# EAGLE board AD5933 (EAGLE 7.7.0)
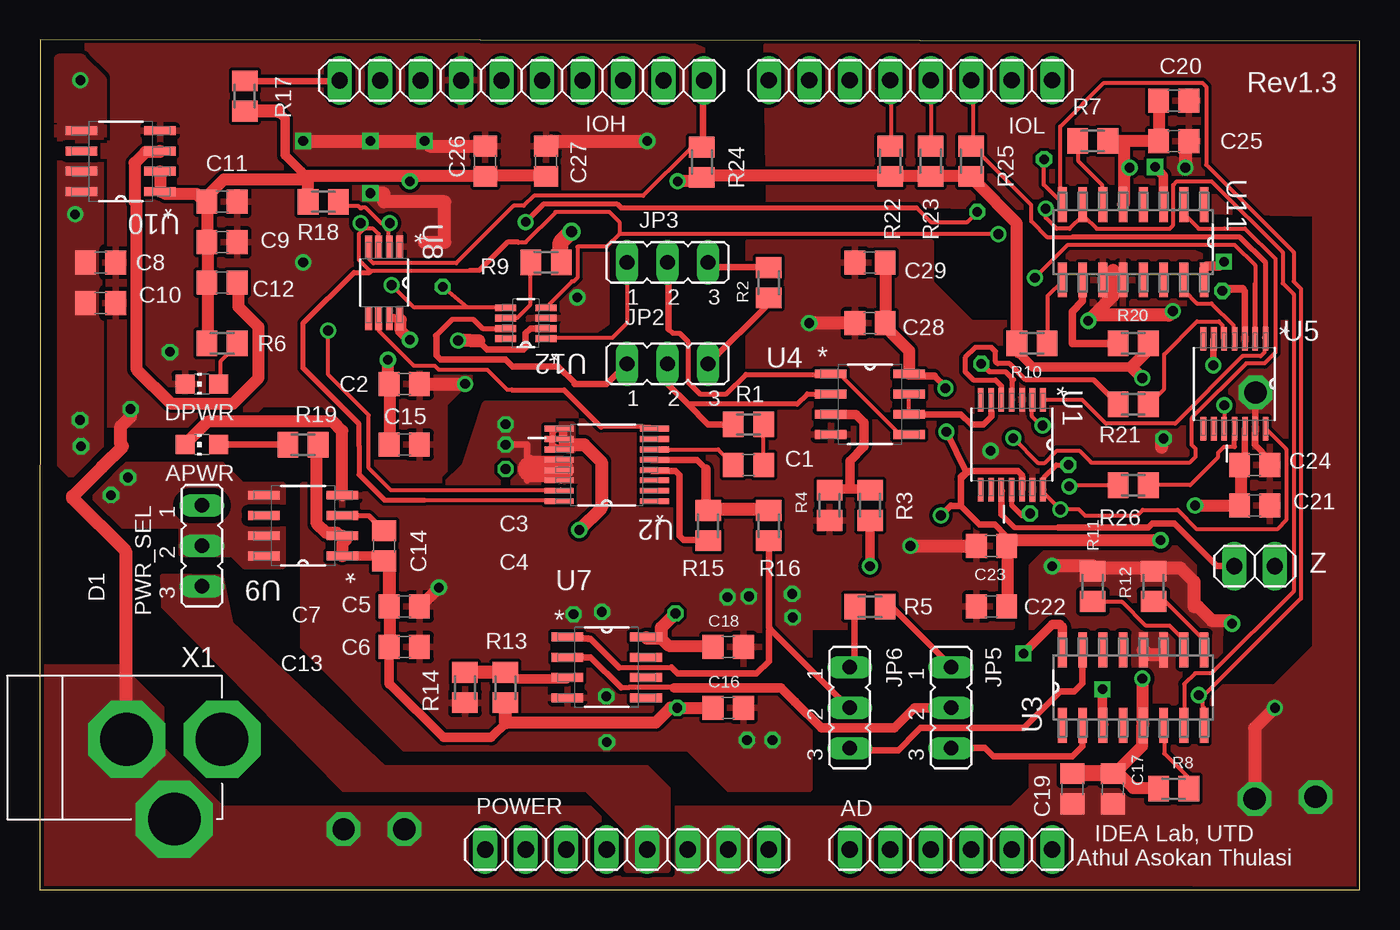
[diagram p0: board, top side]
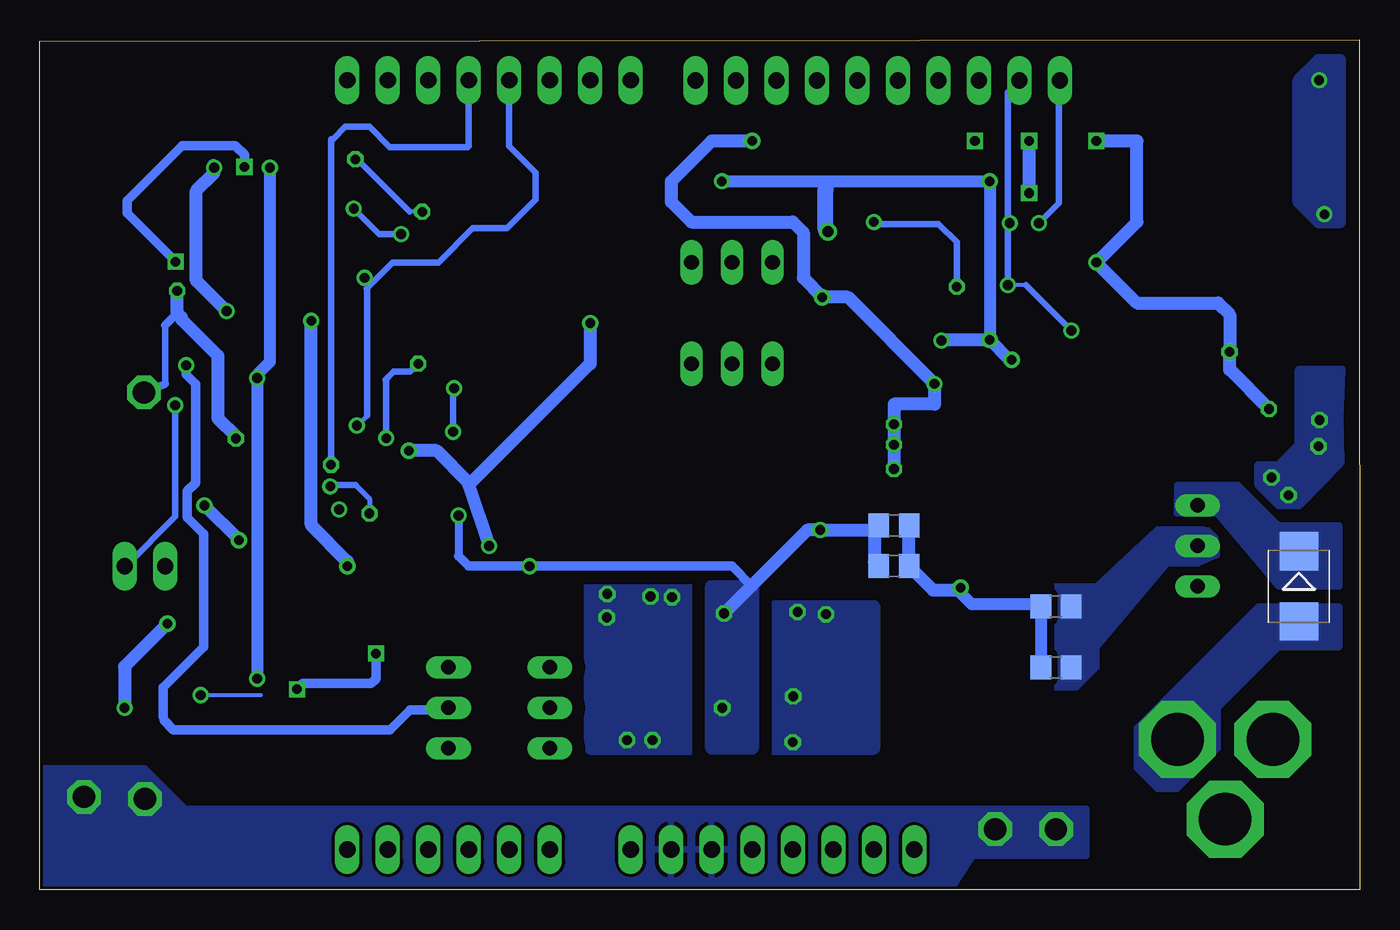
[diagram p1: board, bottom side, seen from below]

Size 82.78 x 53.34 mm. Coordinates in mm from the lower left corner, seen from the top.
Outline: 0,0 82.78,0 82.78,53.26 0.03,53.34 0,0
Copper layers (1*16): Top 0.035mm / dielectric 1.6mm / Bottom 0.035mm
Design rules "default *": minimum track width 10mil, minimum drill 12mil, track to track 8mil, track to pad 8mil, pad to pad 8mil, via to via 8mil, smd to smd 8mil, copper to edge 8mil, drill to drill 12mil, minimum pad ring 10mil, minimum via ring 8mil, stop-mask expansion 6mil, vias tented up to drill 0mil, thermal gap 10mil
Net classes: 0 default: drill 0.305 mm; 1 power 5v: width 0.406 mm, drill 0.61 mm

## Footprints (pad centres in the part's own frame; a part is rotated, then mirrored left to right if it is on the bottom)
1X06 = drill 1.016 long: 1 -6.35,0; 2 -3.81,0; 3 -1.27,0; 4 1.27,0; 5 3.81,0; 6 6.35,0
CHIP-LED0805 = smd 1.2 x 1.2: A 0,-1.05; C 0,1.05
C0805 = smd 1.3 x 1.5: 1 -0.95,0; 2 0.95,0
SMB = smd 2.4 x 2.4: A 2.2,0; C -2.2,0
1X10 = drill 1.016 long: 1 -11.43,0; 2 -8.89,0; 3 -6.35,0; 4 -3.81,0; 5 -1.27,0; 6 1.27,0; 7 3.81,0; 8 6.35,0; 9 8.89,0; 10 11.43,0
1X08 = drill 1.016 long: 1 -8.89,0; 2 -6.35,0; 3 -3.81,0; 4 -1.27,0; 5 1.27,0; 6 3.81,0; 7 6.35,0; 8 8.89,0
JP2 = drill 0.914 long: 1 -2.54,0; 2 0,0; 3 2.54,0
M0805 = smd 1.3 x 1.6: 1 -0.95,0; 2 0.95,0
SOP65P640X120-14N = smd 1.473 x 0.356: 1 -2.819,1.956; 2 -2.819,1.295; 3 -2.819,0.66; 4 -2.819,0; 5 -2.819,-0.66; 6 -2.819,-1.295; 7 -2.819,-1.956; 8 2.819,-1.956; 9 2.819,-1.295; 10 2.819,-0.66; 11 2.819,0; 12 2.819,0.66; 13 2.819,1.295; 14 2.819,1.956
SOP65P640X120-16N = smd 1.473 x 0.356: 1 -2.819,2.286; 2 -2.819,1.626; 3 -2.819,0.965; 4 -2.819,0.33; 5 -2.819,-0.33; 6 -2.819,-0.965; 7 -2.819,-1.626; 8 -2.819,-2.286; 9 2.819,-2.286; 10 2.819,-1.626; 11 2.819,-0.965; 12 2.819,-0.33; 13 2.819,0.33; 14 2.819,0.965; 15 2.819,1.626; 16 2.819,2.286 | smd 0.711 x 0.356: P$1 3.556,2.286; P$2 3.556,1.626; P$3 3.556,0.965; P$4 3.556,0.33; P$5 3.556,-0.33; P$6 3.556,-0.965; P$7 3.556,-1.626; P$8 3.556,-2.286; P$9 -3.556,-2.286; P$10 -3.556,-1.626; P$11 -3.556,-0.965; P$12 -3.556,-0.33; P$13 -3.556,0.33; P$14 -3.556,0.965; P$15 -3.556,1.626; P$16 -3.556,2.286
SOIC127P600X175-16N = smd 2.184 x 0.559: 1 -2.362,4.445; 2 -2.362,3.175; 3 -2.362,1.905; 4 -2.362,0.635; 5 -2.362,-0.635; 6 -2.362,-1.905; 7 -2.362,-3.175; 8 -2.362,-4.445; 9 2.362,-4.445; 10 2.362,-3.175; 11 2.362,-1.905; 12 2.362,-0.635; 13 2.362,0.635; 14 2.362,1.905; 15 2.362,3.175; 16 2.362,4.445
SOIC127P600X175-8N = smd 1.981 x 0.559: 1 -2.464,1.905; 2 -2.464,0.635; 3 -2.464,-0.635; 4 -2.464,-1.905; 5 2.464,-1.905; 6 2.464,-0.635; 7 2.464,0.635; 8 2.464,1.905
SOP65P490X110-8N = smd 1.397 x 0.432: 1 -2.261,0.965; 2 -2.261,0.33; 3 -2.261,-0.33; 4 -2.261,-0.965; 5 2.261,-0.965; 6 2.261,-0.33; 7 2.261,0.33; 8 2.261,0.965
SOT65P280X145-8N = smd 1.321 x 0.432: 1 -1.27,0.965; 2 -1.27,0.33; 3 -1.27,-0.33; 4 -1.27,-0.965; 5 1.27,-0.965; 6 1.27,-0.33; 7 1.27,0.33; 8 1.27,0.965
DC-21MM = drill 3.302 pad 4.826 octagon: 1 -5.08,-3.353; 2 -0.076,-6.35; 3 -0.076,-0.356
1X02 = drill 1.016 long: 1 -1.27,0; 2 1.27,0

## Placement (x,y rotation side)
AD  6  [1X06]  57.15,2.54 0 top
APWR  GREEN  [CHIP-LED0805]  10.16,27.94 90 top
C1  1u  [C0805]  44.45,26.67 0 top
C2  0.1u  [C0805]  22.86,31.75 0 top
C3  10u  [C0805]  29.21,22.86 0 bottom
C4  0.1u  [C0805]  29.21,20.32 0 bottom
C5  10u  [C0805]  22.86,17.78 0 top
C6  0.1u  [C0805]  22.86,15.24 0 top
C7  0.1u  [C0805]  19.05,17.78 180 bottom
C8  0.1u  [C0805]  3.81,39.37 0 top
C9  10u  [C0805]  11.43,40.64 0 top
C10  10u  [C0805]  3.81,36.83 0 top
C11  0.1u  [C0805]  11.43,43.18 0 top
C12  0.1u  [C0805]  11.43,38.1 180 top
C13  10u  [C0805]  19.05,13.97 180 bottom
C14  0.1u  [C0805]  21.59,21.59 270 top
C15  1u  [C0805]  22.86,27.94 0 top
C16  10u  [C0805]  43.18,11.43 0 top
C17  0.1u  [C0805]  67.31,6.35 270 top
C18  0.1u  [C0805]  43.18,15.24 0 top
C19  10u  [C0805]  64.77,6.35 270 top
C20  0.1u  [C0805]  71.12,49.53 0 top
C21  0.1u  [C0805]  76.2,24.13 0 top
C22  0.1u  [C0805]  59.69,17.78 180 top
C23  10u  [C0805]  59.69,21.59 180 top
C24  10u  [C0805]  76.2,26.67 0 top
C25  10u  [C0805]  71.12,46.99 0 top
C26  0.1u  [C0805]  27.94,45.72 90 top
C27  10u  [C0805]  31.75,45.72 90 top
C28  10u  [C0805]  52.07,35.56 180 top
C29  0.1u  [C0805]  52.07,39.37 180 top
D1  M7  [SMB]  3.81,19.05 270 bottom
DPWR  GREEN  [CHIP-LED0805]  10.16,31.75 90 top
IOH  10  [1X10]  30.23,50.79 180 top
IOL  8  [1X08]  54.61,50.8 180 top
JP2  3  [JP2]  39.37,33.02 0 top
JP3  3  [JP2]  39.37,39.37 0 top
JP5  3  [JP2]  57.15,11.43 270 top
JP6  3  [JP2]  50.8,11.43 270 top
POWER  8  [1X08]  36.83,2.54 0 top
PWR_SEL  3  [JP2]  10.16,21.59 270 top
R1  70K  [M0805]  44.45,29.21 180 top
R2  10K  [M0805]  45.72,38.1 90 top
R3  50K  [M0805]  52.07,24.13 270 top
R4  50K  [M0805]  49.53,24.13 90 top
R5  168.75K  [M0805]  52.07,17.78 180 top
R6  325  [M0805]  11.43,34.29 180 top
R7  2.2K  [M0805]  66.04,46.99 0 top
R8  2.2K  [M0805]  71.12,6.35 180 top
R9  2.2K  [M0805]  31.75,39.37 180 top
R10  2.2K  [M0805]  62.23,34.29 180 top
R11  2.2K  [M0805]  66.04,19.05 90 top
R12  2.2K  [M0805]  69.85,19.05 90 top
R13  50K  [M0805]  29.21,12.7 270 top
R14  50K  [M0805]  26.67,12.7 90 top
R15  20K  [M0805]  41.91,22.86 90 top
R16  20K  [M0805]  45.72,22.86 90 top
R17  2.2K  [M0805]  12.85,49.81 270 top
R18  2.2K  [M0805]  17.78,43.18 180 top
R19  325  [M0805]  16.51,27.94 0 top
R20  2.2K  [M0805]  68.58,34.29 0 top
R21  18K  [M0805]  68.58,30.48 180 top
R22  DNI  [M0805]  53.34,45.72 270 top
R23  DNI  [M0805]  55.88,45.72 270 top
R24  DNI  [M0805]  41.53,45.66 270 top
R25  DNI  [M0805]  58.42,45.72 270 top
R26  DNI  [M0805]  68.58,25.4 180 top
U1  ADG1604BRUZ  [SOP65P640X120-14N]  60.96,27.94 270 top
U2  AD5933YRSZ  [SOP65P640X120-16N]  35.56,26.67 180 top
U3  AD5242BRZ1M  [SOIC127P600X175-16N]  68.58,12.7 90 top
U4  AD8606ARZ  [SOIC127P600X175-8N]  52.07,30.48 0 top
U5  ADG1604BRUZ  [SOP65P640X120-14N]  74.93,31.75 270 top
U7  AD8606ARZ  [SOIC127P600X175-8N]  35.56,13.97 0 top
U8  LTC6904MPMS8TRPBF  [SOP65P490X110-8N]  21.59,38.1 270 top
U9  ADP3303ARZ-3.3  [SOIC127P600X175-8N]  16.51,22.86 180 top
U10  ADP3303ARZ-3.3  [SOIC127P600X175-8N]  5.08,45.72 180 top
U11  AD5242BRZ1M  [SOIC127P600X175-16N]  68.58,40.64 270 top
U12  AD5245BRJZ100-R2  [SOT65P280X145-8N]  30.48,35.56 180 top
X1  DC21MMX  [DC-21MM]  5.08,9.53 90 top
Z  2  [1X02]  76.2,20.32 180 top

## Library data of the parts
AD IOH IOL POWER Z = pinhead
APWR DPWR = led
C1-C29 R1-R26 = rcl
D1 = diode
JP2 JP3 JP5 JP6 PWR_SEL = jumper
U1 U5 = ADI Batch_1; MPN: ADG1604BRUZ; OC_FARNELL: 1827326; OC_NEWARK: 71P7802; PACKAGE: TSSOP-14; SUPPLIER: Analog Devices
U2 = ADI Batch_1; MPN: AD5933YRSZ; OC_FARNELL: 1438950; OC_NEWARK: 06M5088; PACKAGE: TSSOP-16; SUPPLIER: Analog Devices
U3 U11 = ADI Batch_2; MPN: AD5242BRZ1M; OC_FARNELL: 1079337; OC_NEWARK: 59K3697; PACKAGE: 16-Lead SOIC_N; SUPPLIER: Analog Devices
U4 U7 = ADI Batch_1; MPN: AD8606ARZ; OC_FARNELL: 9994343; OC_NEWARK: 19M0974; PACKAGE: SOIC-8; SUPPLIER: Analog Devices
U8 = LTC_Batch_1; MPN: LTC6904MPMS8#TRPBF; OC_FARNELL: -; OC_NEWARK: 67R6296; PACKAGE: MSOP-8; SUPPLIER: Linear Technology
U9 U10 = ADI Batch_1; MPN: ADP3303ARZ-3.3; OC_FARNELL: 1424477; OC_NEWARK: 59K2583; PACKAGE: SOIC-8; SUPPLIER: ANALOG DEVICES
U12 = ADI Batch_1; MPN: AD5245BRJZ100-R2; OC_FARNELL: 1699663; OC_NEWARK: 82H8715; PACKAGE: SOT-23-8; SUPPLIER: Analog Devices
X1 = powersupply

## Nets
5V5 [power 5v]: POWER.5 PWR_SEL.3
A01: IOL.3 R25.1 U1.1 U5.1
A11: IOL.4 R23.1 U1.14 U5.14
AGND [power 5v]: APWR.C C3.2 C4.2 C5.2 C6.2 C7.2 C13.2 C16.2 C18.2 C21.2 C22.2 C23.2 C24.2 C28.2 C29.2 R4.1 R14.1 U1.3 U1.13 U2.12 U2.13 U2.14 U4.4 U5.3 U5.13 U7.4 U9.4
EN1: IOL.5 R22.1 U1.2 U5.2
GND [power 5v]: C2.2 C8.2 C9.2 C10.2 C11.2 C15.2 C17.2 C19.2 C20.2 C25.2 C26.2 C27.2 DPWR.C IOH.7 POWER.6 POWER.7 R11.2 R12.2 U3.11 U3.12 U8.1 U10.4 U11.11 U11.12 U12.3 X1.1 X1.3
N$1: C1.1 U2.6
N$2: C1.2 R1.1
N$7: JP5.1 R5.1
N$10: R7.1 U11.6
N$11 [power 5v]: C12.1 U10.3
N$20: DPWR.A R6.1
N$22: JP3.3 R2.2
N$28: JP6.1 R5.2
N$32: R8.1 U3.6
N$34: APWR.A R19.1
N$35: JP2.3 R2.1
N$38: C14.1 U9.3
PWR_INPUT [power 5v]: C7.1 C8.1 C10.1 C13.1 PWR_SEL.2 U9.5 U9.7 U9.8 U10.5 U10.7 U10.8
PWRIN: D1.A X1.2
SCL: IOH.10 R17.1 U2.16 U3.7 U8.3 U11.7 U12.4
SDA: IOH.9 R18.1 U2.15 U3.8 U8.2 U11.8 U12.5
SEN: IOH.1 R24.1 U8.4
U1_S1: U1.4 U11.2
U1_S2: R21.2 U1.5
U1_S3: R26.2 U1.11
U2_MCLK: U2.8 U8.6
U2_RFB: R15.1 U2.4
U2_VIN: R15.2 R16.2 U2.5
U3_A1: JP5.3 U3.2
U3_AD0: R12.1 U3.9
U3_AD1: R11.1 U3.10
U3_W1: U3.3 U3.16
U3_W2: JP6.3 U3.15
U4_INA++: R3.1 R4.2 U4.3
U4_INA--: JP2.2 R1.2 U4.2
U4_OUTA: JP3.2 U4.1 U4.5
U4_OUTB: U1.6 U4.6 U4.7
U5_S2: R21.1 U5.5
U5_S3: R26.1 U5.11
U7_INA+: R13.1 R14.2 U7.3
U7_INA-: JP5.2 U5.6 U7.2
U7_OUTA: JP6.2 R16.1 U7.1
U11_AD0: R10.1 U11.9
U11_AD1: R20.1 U11.10
U11_W1: U11.3 U11.16
U11_W2: U5.4 U11.15
U12_AD0: R9.2 U12.6
U12_B: JP2.1 U12.7
U12_W: JP3.1 U12.1
VCC [power 5v]: C3.1 C4.1 C5.1 C6.1 C14.2 C16.1 C18.1 C21.1 C22.1 C23.1 C24.1 C28.1 C29.1 R3.2 R13.2 R19.2 U1.12 U2.9 U2.10 U2.11 U4.8 U5.12 U7.8 U9.1 U9.2
VDD [power 5v]: C2.1 C9.1 C11.1 C12.2 C15.1 C17.1 C19.1 C20.1 C25.1 C26.1 C27.1 R6.2 R7.2 R8.2 R9.1 R10.2 R17.2 R18.2 R20.2 R22.2 R23.2 R24.2 R25.2 U3.5 U8.7 U8.8 U10.1 U10.2 U11.5 U12.2
VIN: D1.C PWR_SEL.1
ZH: U5.10 Z.1
ZL: U1.10 Z.2

## Tracks (layer width: path | path; a pad name or v marks a point on that pad's centre or on a via)
5V5
  pour Top (no thermals): 7.8,17.78 7.75,19.68 11.35,19.61 11.94,16.71 21.59,7.62 38.1,7.62 39.37,6.35 39.37,1.27 36.83,1.27 36.83,3.81 34.29,6.35 19.05,6.35
A01
  Top 0.254: IOL.3 58.52,50.75 58.52,46.75 R25.1 58.52,46.63 62.18,42.98 62.18,41.96 63.17,40.97 64.77,40.97 | U1.1 62.98,30.75 65.38,30.75 66.86,29.26 71.21,29.26 75.44,33.49 76.58,33.49 76.81,33.72 76.81,34.52 U5.1 76.81,34.63
  Top 0.305: 76.81,34.63 76.89,34.71 76.89,39.34 75.26,40.97 64.77,40.97
A11  (via drill 0.6, 0.61)
  Top 0.254: R23.1 55.89,46.75 55.89,50.75 IOL.4 | 62.98,25.03 U1.14 62.92,24.97 v64.01,23.88 65.16,23.88 65.57,23.47 65.6,23.5 68.83,23.5 69.18,23.84 71.37,23.84 72.58,22.63 77.61,22.63 78.18,23.2 78.18,27.66 76.92,28.92 U5.14
  Top 0.305: U1.14 62.99,25.12 62.99,25.91 63.75,26.67 v64.52,26.67
  Bottom 0.254: 55.89,50.75 IOL.4
  Bottom 0.305: R23.1 55.94,46.61 | 64.39,47.12 64.52,47.12
  Bottom 0.406: R23.1 IOL.4 | v64.52,26.67 64.52,47.12 | 55.94,46.61 60.83,46.61 62.1,47.88 63.63,47.88 64.39,47.12
AGND  (via drill 0.61, 1.4)
  Top 0.406: U5.13 76.22,27.94 76.2,27.94 | 76.2,27.94 77.15,26.99 C24.2 | v76.26,31.21 76.2,27.94 | 75.44,37.72 75.59,37.57 U5.3 | v29.21,27.94 30.56,27.94 30.56,27.1 | 30.56,27.1 30.79,27.1 30.79,26.8 | 32.69,25.7 32.69,27 U2.12 U2.13 32.66,26.42 | 30.56,26.16 30.56,27.1 | 30.56,25.7 30.56,26.16 | 30.56,26.16 30.81,26.42
  Top 0.508: v74.17,37.59 74.3,37.72 75.44,37.72
  Top 0.762: U9.4 18.97,28.8 18.4,29.38 10.52,29.38 9.14,28 APWR.C | v25.03,18.97 23.89,17.83 C5.2
  Top 0.813: C28.2 v48.26,35.56 | v54.61,21.59 C23.2 | v70.48,28.32 70.36,28.19 70.36,27.76
  Top 1.676: 30.81,26.42 32.66,26.42
  Bottom 0.406: 74.93,31.75 74.93,35.43 74.42,35.94 73.91,35.94
  Bottom 0.508: 74.93,31.75 v76.26,31.21 | 74.93,35.43 74.3,36.07 74.3,36.2 74.17,36.32 v74.17,37.59
  Bottom 0.762: C13.2 20,14.06 20,17.72 C7.2 20.34,17.95 24.35,17.95 25.2,18.8 v25.03,18.97
  Bottom 0.813: v48.26,35.56 48.26,33.02 55.88,25.4 | 55.88,25.4 v54.61,21.59 | 25.2,18.8 26.74,18.8 C4.2 C3.2 | v74.17,37.59 74.17,36.2 73.91,35.94 73.91,35.81 71.63,33.53 71.63,29.59 70.48,28.45 v70.48,28.32 | 55.88,25.4 55.88,25.53 57.91,27.56 v59.64,27.56
  other vias: 45.95,9.4 44.35,9.4 47.19,18.57 47.22,17.09 44.48,18.41 43.13,18.36 33.48,17.3 35.26,17.45 35.53,12.14 35.56,9.27 29.21,29.21
  pour Top (rank 2): 66.04,25.4 71.12,25.4 71.12,22.86 78.74,22.86 78.74,35.56 58.42,35.56 55.88,38.1 55.88,40.64 44.45,40.64 44.45,31.75 43.18,30.48 27.94,30.48 26.67,26.67 25.4,25.4 16.51,25.4 16.51,15.24 22.86,8.89 40.64,8.89 43.18,6.35 48.26,6.35 48.26,16.51 60.96,16.51 60.96,22.86 62.23,24.13
  pour Bottom (isolate 0.813, rank 2): 41.91,19.05 48.26,19.05 48.26,8.89 41.91,8.89
  pour Bottom (isolate 0.813, rank 2): 30.48,17.78 36.75,17.75 36.83,8.89 30.48,8.89
  pour Top (rank 2, no thermals): 33.73,27.03 33.73,25.76 30.76,25.76 30.76,26.01 30.76,27
  pour Top (rank 2): 30.71,27.03 33.86,27.03 33.86,26.52 33.86,25.73 30.78,25.81 30.71,25.81 30.71,27
EN1  (via drill 0.61)
  Top 0.254: 62.29,30.75 U1.2 | v62.41,38.41 64.49,40.49 74.93,40.49 76.22,39.19 76.22,38.02 | R22.1 53.38,46.75 53.38,50.75 IOL.5 | 62.23,30.48 62.26,30.5 U1.2 | v62.9,29.13 62.81,29.13 62.23,29.72 62.23,30.73 U1.2 | 62.26,31.37 U1.2
  Top 0.305: U5.2 76.22,38.02
  Bottom 0.254: 53.38,50.75 IOL.5 | 62.29,37.72 62.23,37.66 62.26,37.63 | U1.2 62.23,30.73 | 62.81,29.13 62.26,29.69 62.26,29.78 v62.9,29.13
  Bottom 0.406: 62.01,38.01 62.29,37.72 | 62.01,38.01 v62.41,38.41 | 62.26,37.63 U1.2 62.26,29.78 | 62.01,38.01 60.64,39.37 57.78,39.37 55.63,41.53 53.47,41.53 51.69,43.31 51.69,45.02 R22.1 53.34,50.71 53.38,50.75
  Bottom 0.61: 62.81,29.13 v62.9,29.13
GND  (via drill 0.61, 1.4)
  Top 0.406: U11.11 66.73,38.28 66.8,38.35
  Top 0.508: 69.95,20 R12.2 | 2.06,24.69 2.06,24.57 | 5.03,36.58 4.8,36.8 C10.2 | 5.37,9.83 X1.3 | 4.69,39.55 C8.2 4.8,39.32 4.88,39.49 | 66.8,38.35 67.31,38.35
  Top 0.762: 5.49,9.49 X1.3
  Top 0.813: 5.37,9.83 5.37,21.26 2.06,24.57 | 2.06,24.69 3.89,26.52 3.89,26.54 5.18,27.84 5.08,27.94 5.08,29.08 5.69,29.69 v5.69,30.18 | C27.2 32.07,46.99 v38.1,46.99 | C2.2 v26.67,31.75 | U3.12 69.49,14.78 70.43,14.78 | R11.2 66.23,20.19 | 66.23,20.19 71.55,20.19 72.39,19.36 72.39,17.78 72.64,17.78 73.53,16.89 74.6,16.89 v74.78,16.71 | v77.47,11.43 76.2,10.16 v76.2,5.71 | 66.23,20.19 66.11,20.32 v63.5,20.32 | v65.76,35.71 66.12,36.07 | 66.12,36.07 67.31,37.26 67.31,38.35 67.31,38.86 | C25.2 71.86,46.78 v71.86,45.31 | v71.07,36.32 70.81,36.07 66.12,36.07 | C26.2 24.45,46.67 v24.13,46.99 v20.73,46.99 v16.51,46.99 | 24.13,40.64 25.4,40.64 25.4,43.18 21.59,43.18 21.59,43.71 v20.73,43.71
  Bottom 0.813: v5.69,30.18 8.15,32.64 v8.15,33.76 8.15,36.09 8.89,36.83 13.97,36.83 v16.51,39.37 13.97,41.91 13.97,46.99 v16.51,46.99 | v38.1,46.99 40.64,46.99 43.18,44.45 43.18,43.18 41.91,41.91 35.56,41.91 34.9,41.25 34.9,38.41 33.71,37.21 v33.71,37.19 32.11,37.19 v26.67,31.75 26.67,30.48 29.21,30.48 v29.21,26.42 | v74.78,16.71 77.47,14.02 v77.47,11.43 | v65.76,35.71 65.76,22.89 63.5,20.62 v63.5,20.32 | 71.88,45.47 v71.86,45.31 71.86,44.98 72.97,43.87 72.97,38.23 v71.07,36.32 | v20.73,43.71 v20.73,46.99
  other vias: 80.01,5.84 19.05,3.81 22.86,3.81
  pour Top (rank 6): 3.05,53.34 1.27,29.21 12.7,29.21 13.97,30.48 17.78,30.48 19.75,28.51 19.75,26.2 20.22,25.72 25.24,25.72 25.4,25.88 25.4,30.48 27.94,33.02 31.75,33.02 35.56,35.56 35.56,41.91 57.15,41.91 57.78,41.28 57.78,38.67 59.75,36.83 80.01,36.83 40.89,52.96
  pour Top (isolate 0.254, rank 2, no thermals): 0,13.97 5.08,13.97 7.62,11.43 7.62,8.89 11.43,5.08 60.96,5.08 62.23,6.35 62.23,20.32 64.77,22.86 69.85,22.86 72.39,20.32 72.39,17.78 74.04,16.64 73.66,0 0,0
  pour Top (rank 6): 80.01,42.42 80.01,15.24 77.47,12.7 72.39,12.7 72.52,0.13 82.68,0.13 82.68,53.09 45.59,52.96 45.72,43.18
  pour Bottom (rank 6): 17.14,5.08 17.14,2.16 24.26,2.16 25.4,0.38 82.55,0.38 82.55,7.62 76.2,7.62 73.66,5.08
N$1
  Top 0.254: C1.1 43.43,26.75 42.55,27.64 U2.6
N$2
  Top 0.254: C1.2 45.38,26.75 45.38,29.19 R1.1
N$7
  Top 0.254: 53.49,17.72 53.03,17.72 R5.1 | 57.15,14.06 JP5.1
  Top 0.406: 57.15,14.06 53.49,17.72
N$10
  Top 0.254: R7.1 65.15,46.98 65.15,45.72 66.64,44.23 66.64,43.09 U11.6
N$11
  Top 0.762: C12.1 12.46,38.06 12.46,36.58 13.72,35.32 13.72,32.12 12.12,30.52 8.23,30.52 6.06,32.69 6.06,43.09 5.94,43.2 5.94,45.61 6.63,46.29 7.54,46.29 U10.3
N$20
  Top 0.254: DPWR.A 11.32,31.77 11.32,33.15 12.46,34.29 R6.1
N$22
  Top 0.254: 45.72,39.09 R2.2
  Top 0.305: 41.91,39.36 JP3.3
  Top 0.406: 45.72,39.09 42.18,39.09 41.91,39.36
N$28
  Top 0.254: 51.09,17.72 R5.2 | 50.86,14.06 JP6.1
  Top 0.406: 51.09,17.72 51.09,14.29 50.86,14.06
N$32
  Top 0.254: R8.1 72.01,6.4 72.01,7.09 70.52,8.57 70.52,10.29 U3.6
N$34
  Top 0.254: R19.1 15.54,28 15.43,28 15.24,27.94
  Top 0.406: APWR.A 15.24,27.94
N$35
  Top 0.254: 45.72,36.8 R2.1 | 41.95,33.03 JP2.3
  Top 0.406: 41.95,33.03 45.72,36.8
N$38
  Top 0.254: 18.97,23.55 U9.3
  Top 0.305: U9.3 20.64,23.5 C14.1
PWR_INPUT  (via drill 0.61)
  other vias: 2.52,29.49 2.58,27.83 4.46,24.77 5.52,25.88 2.21,42.39 2.54,50.8
  pour Top (isolate 0.406, no thermals): 8.89,22.86 8.89,21.59 8.89,21.08 9.33,21.08 12.06,21.08 12.82,20.32 15.24,20.32 15.24,25.4 12.7,25.4 11.43,26.67 5.08,26.67 3.81,27.94 3.81,33.02 3.81,49.53 1.27,49.53 1.27,26.67 5.08,22.86
  pour Bottom (isolate 0.406, no thermals): 8.94,21.03 10.13,20.47 12.09,20.5 16.51,15.24 16.51,13.97 17.78,12.7 19.05,12.7 19.05,19.05 16.51,19.05 12.67,22.64 9.85,22.63 9.78,22.53 9.59,22.63 9.07,22.11
  pour Bottom: 1.27,29.62 1.22,26.8 3.81,24.13 5.08,24.13 6.35,25.4 6.35,26.67 5.08,26.67 3.81,27.94 3.81,32.64 1.14,32.66
  pour Bottom: 1.27,52.07 1.27,41.91 2.54,41.91 3.81,43.18 3.81,50.8 2.54,52.07
  pour Top: 1.27,52.07 1.27,46.99 3.81,46.99 3.81,50.8 2.54,52.07
PWRIN
  pour Bottom (no thermals): 1.27,17.78 6.35,17.78 13.97,10.16 13.97,7.62 12.7,6.35 11.43,6.35 8.89,8.89 8.89,11.43 5.08,15.24 1.27,15.24
SCL  (via drill 0.61)
  Top 0.254: 18.75,50.75 IOH.10 | 20.69,38.86 26.98,38.86 | 20.69,38.86 20,39.55 20,41.15 20.34,41.49 | 20.34,41.49 20.92,41.49 21.26,41.15 U8.3 | U12.4 31.77,36.58 33.38,38.18 33.49,38.18 33.72,38.41 33.72,40.35 35.55,40.35 36.35,41.15 | 24.12,24.46 32.69,24.46 U2.16 | 20.69,38.75 20.69,38.86 | v20.12,41.83 20.34,41.6 20.34,41.49 | U3.7 71.78,10.4 71.78,12.92 72.47,13.6 73.5,13.6 78.64,18.75 78.64,37.38 77.95,38.06 77.95,40.01 73.5,44.46 71.32,44.46 71.09,44.23 71.09,41.72 70.87,41.49 66.29,41.49 65.49,42.29 65.49,42.98 U11.7 65.38,42.29 64.58,41.49 63.78,41.49 63.09,42.18 v63.09,42.75 | v60.12,41.15 36.35,41.15 | 30.02,40.64 30.48,40.64 32.33,42.49 32.33,42.55 35.71,42.55 36.35,41.91 36.35,41.15
  Top 0.305: 24.12,24.46 21.61,24.46 20.02,26.06 20.02,27.88 20,27.89 20.02,27.9 20.02,29.23 16.51,32.74 16.51,35.56 19.7,38.75 20.69,38.75 | 30.02,40.64 29.34,40.64 27.56,38.86 26.98,38.86
  Top 0.406: 18.75,50.75 R17.1
  Bottom 0.254: 18.86,50.75 IOH.10
  Bottom 0.406: 18.86,50.75 18.86,43.09 v20.12,41.83 | v60.12,41.15 61.49,41.15 v63.09,42.75
SDA  (via drill 0.6, 0.61)
  Top 0.254: U8.2 21.83,40.46 21.83,41.38 21.66,41.55 v21.95,41.83 21.41,41.83 20.45,42.8 20.19,42.8 20.17,42.77 20.12,42.77 20.02,42.88 19.99,42.88 19.94,42.93 18.91,42.93 18.75,43.09 R18.1 | 26.8,36.58 23.43,36.58 v22.06,37.95 | 26.8,36.58 29.15,36.58 U12.5 | U2.15 32.69,25.15 32.61,25.07 22.02,25.07 20.62,26.47 20.62,29.79 18.09,32.33 v18.09,35.09 | 72.92,12.12 72.92,11.54 73.04,11.43 73.04,10.4 U3.8 | 72.92,12.12 79.1,18.29 79.1,37.72 78.64,38.18 78.64,40.01 73.15,45.49 73.15,50.41 72.92,50.63 66.75,50.63 64.01,47.89 64.01,43.2 | 64.01,43.2 64.12,43.09 U11.8 | v72.69,12.23 72.81,12.12 72.92,12.12 | 64.01,43.2 62.97,44.25 62.97,45.82 v62.99,45.85 | 54.99,42.8 55.88,41.91 58.17,41.91 v58.8,42.55 | v25.27,37.85 26.8,36.58
  Top 0.305: v30.48,41.91 31.62,43.05 36.2,43.05 36.45,42.8 54.99,42.8
  Bottom 0.254: 21.37,50.75 IOH.9 | 22.06,37.83 v22.06,37.95 20.94,37.95 | v21.95,41.83 22.06,41.83 | v72.69,12.23 68.92,12.23 | v30.48,41.91 30.35,41.78 | v62.99,45.85 62.89,45.85 | v58.8,42.55 59.59,42.55
  Bottom 0.406: v22.06,37.95 22.06,41.83 22.06,50.06 21.37,50.75 | v18.09,35.09 20.94,37.95 | 30.35,41.78 26.42,41.78 25.27,40.64 v25.27,37.85 | 62.89,45.85 59.59,42.55
SEN
  Top 0.254: U8.4 20.69,40.35 20.69,39.55 20.92,39.32 26.11,39.32 29.72,42.93 30.35,42.93 30.99,43.56 37.85,43.56 40.8,46.52 41.49,46.52 R24.1 41.6,46.63 | 41.6,50.75 IOH.1
  Top 0.406: 41.6,46.63 41.6,50.75
U1_S1  (via drill 0.6)
  Top 0.254: 61.04,30.75 U1.4 | U11.2 71.78,42.98 71.78,42.41 72.69,41.49 74.3,41.49 74.31,41.5 75.59,41.5 77.5,39.6 77.5,33.72 76.81,33.03 75.67,33.03 72.26,29.63 72.26,29.59 72.24,29.57 72.24,27.94 72.48,27.69 72.48,27.17 72.14,26.82 65.91,26.82 65.91,26.85 65.2,27.56 63.8,27.56 63.04,26.8 62.61,26.8 v61.06,28.35
  Top 0.305: v59.05,33.02 59.56,32.51 60.58,32.51 61.09,32 60.96,32 U1.4
  Bottom 0.406: v59.05,33.02 59.56,32.51 60.6,32.51 61.09,32.03 | v61.06,28.35 61.06,32.03 | 61.06,32.03 60.71,32.38 | 61.06,32.03 61.09,32.03 | 61.09,32.03 61.09,32
U1_S2
  Top 0.305: R21.2 66.11,32 61.85,32 60.83,33.02 60.07,33.02 59.94,33.15 59.94,33.78 59.69,34.04 58.67,34.04 58.04,33.4 58.04,32.51 58.55,32 59.94,32 60.33,31.62 60.33,31.37 60.3,31.34 U1.5
U1_S3  (via drill 0.6)
  Top 0.254: 64.64,25.4 R26.2
  Top 0.305: v62.1,23.62 61.98,23.5 61.59,23.5 60.96,24.13 U1.11
  Top 0.61: v64.57,25.32 64.64,25.4
  Bottom 0.254: v64.57,25.32 64.49,25.4 | 62.97,25.4 62.99,25.38
  Bottom 0.305: 62.97,25.4 62.1,24.54 v62.1,23.62
  Bottom 0.406: 64.49,25.4 62.97,25.4
U2_MCLK
  Top 0.254: U8.6 21.26,35.09 23.46,32.89 24.77,32.89 25.02,32.64 28.07,32.64 29.34,31.37 29.59,31.37 | 35.2,29.03 38.29,29.03 U2.8
  Top 0.305: 29.59,31.37 32.89,31.37 35.2,29.06 35.2,29.03
U2_RFB
  Top 0.254: 38.41,26.29 U2.4 | 41.83,21.96 R15.1
  Top 0.406: 38.41,26.29 39.88,26.29 40.13,26.04 40.13,22.23 40.39,21.97 41.85,21.97 R15.1
U2_VIN
  Top 0.254: 41.83,24.35 41.83,23.9 R15.2 41.95,23.9 | 38.41,26.98 U2.5 | 45.72,23.9 R16.2
  Top 0.406: 38.41,26.98 41.22,26.98 41.78,26.42 | 41.78,24.4 41.83,24.35
  Top 0.61: 41.78,26.42 41.78,24.4
  Top 0.813: 41.95,23.9 45.72,23.9
U3_A1
  Top 0.254: 65.38,9.72 65.38,10.29 U3.2 | 57.15,8.91 JP5.3
  Top 0.406: 57.15,8.91 59.28,8.91 59.82,8.38 64.77,8.38 65.41,9.02 65.41,9.69 65.38,9.72
U3_AD0
  Top 0.254: R12.1 69.95,18.06 70.64,18.06 72.92,15.77 72.92,15.09 U3.9
U3_AD1
  Top 0.254: R11.1 66.06,18.06 67.89,18.06 69.38,16.57 70.87,16.57 71.67,15.77 71.67,15.09 U3.10
U3_W1  (via drill 0.6)
  Top 0.254: 66.75,10.4 U3.3
  Top 0.61: 66.75,10.4 66.65,10.5 v66.65,12.6 | v61.7,14.83 63.52,16.66 63.98,16.66 64.14,16.51 U3.16
  Bottom 0.61: v66.65,12.6 66.29,12.95 62,12.95 61.7,13.26 v61.7,14.83
U3_W2
  Top 0.254: 65.38,14.4 65.38,14.97 U3.15 | 51.32,8.91 50.86,8.91 JP6.3
  Top 0.305: 50.93,8.76 JP6.3 | 65.41,14.38 65.38,14.4
  Top 0.406: 50.93,8.76 53.85,8.76 55.03,9.94 55.24,10.16 61.72,10.16 64.01,12.45 64.9,12.45 65.41,12.95 65.41,14.38
U4_INA++
  Top 0.254: 49.61,25.15 R4.2 | 52.01,25.15 R3.1
  Top 0.61: 52.01,25.15 50.93,25.15 | 50.93,25.15 49.61,25.15 | U4.3 51.18,29.84 51.69,29.34 51.69,27.81 50.8,26.92 50.8,25.27 50.93,25.15
U4_INA--
  Top 0.305: 40.64,30.48 47.5,30.48 48.13,31.11 U4.2
  Top 0.406: JP2.2 39.37,31.75 40.64,30.48 41.91,29.21 R1.2
U4_OUTA
  Top 0.254: U4.5 53.95,28.57 50.18,32.35 49.61,32.35 U4.1 49.49,32.35 49.03,32.35 | 39.43,39.32 JP3.2
  Top 0.305: 49.03,32.35 44.28,32.35 43.05,31.11 41.4,31.11 40.64,31.88 40.64,34.42 40.13,34.92 39.71,34.92 39.43,35.2
  Top 0.406: 39.43,35.2 39.43,39.32
U4_OUTB
  Top 0.254: 54.63,29.83 U4.6 54.52,29.95 54.52,31.09 U4.7
  Top 0.305: 59.69,29.97 59.66,30 U1.6
  Top 0.406: U4.6 57.78,29.84 58.42,29.21 59.18,29.21 59.69,29.72 59.69,29.97
U5_S2
  Top 0.254: U5.5 74.18,34.63 74.18,35.43 73.95,35.66 72.58,35.66 70.52,33.6 70.52,31.43 69.61,30.52 R21.1
U5_S3
  Top 0.254: 74.87,28.92 U5.11 | R26.1 72.15,25.4 73.91,27.16 73.91,27.43 74.3,27.81 74.93,27.81
  Top 0.305: 74.93,27.81 U5.11
U7_INA+
  Top 0.254: 33.03,13.26 U7.3
  Top 0.305: 33.03,13.26 33.03,13.25 | 29.77,13.25 29.37,13.65 R13.1
  Top 0.61: 33.03,13.25 29.77,13.25
  Top 0.813: R13.1 R14.2
U7_INA-  (via drill 0.61)
  Top 0.254: 73.61,34.52 U5.6 | 33.15,14.52 U7.2 | 36.92,12.69 36.93,12.69 36.93,12.7
  Top 0.305: 39.75,12.7 36.93,12.7 36.45,12.7 | 47.37,11.81 47.36,11.81
  Top 0.406: v73.61,32.92 73.61,34.52 | 39.76,12.69 39.75,12.7 | 36.45,12.7 34.54,14.61 U7.2
  Top 0.61: 39.76,12.69 46.48,12.69 47.36,11.81 | 47.37,11.81 49.02,10.16 53.59,10.16 54.86,11.43 JP5.2
  Bottom 0.254: 57.28,11.3 JP5.2
  Bottom 0.406: 74.98,10.63 74.98,10.79 75.06,10.87
  Bottom 0.61: 74.98,10.63 74.41,10.06 60.81,10.06 59.56,11.3 57.28,11.3 | v73.61,32.92 73.61,32.33 73.03,31.75 73.03,25.53 73.53,25.02 73.53,23.37 72.52,22.35 72.52,15.24 75.06,12.7 75.06,10.87
U7_OUTA
  Top 0.254: 50.75,11.43 JP6.2 | 33.15,15.77 U7.1
  Top 0.305: 36.32,13.97 39.62,13.97
  Top 0.406: R16.1 45.72,16.46 45.82,16.36 | 50.75,11.43 45.82,16.36 | 33.15,15.77 34.39,15.77 34.42,15.75 34.54,15.75 36.32,13.97 | 39.62,13.97 40.01,13.59 44.96,13.59 45.72,14.35 45.72,16.26 45.82,16.36
U11_AD0
  Top 0.254: R10.1 63.21,34.29 63.21,37.26 64.12,38.18 U11.9
U11_AD1
  Top 0.457: U11.10 65.41,36.93 64.77,36.3 64.77,34.29 R20.1
U11_W1  (via drill 0.6)
  Top 0.254: 70.41,42.98 U11.3
  Top 0.61: U11.16 73.03,38.99 73.18,39.14 73.99,39.14 v74.27,39.42 | v69.95,45.36 70.48,44.83 U11.3
  Bottom 0.61: v74.27,39.42 77.32,42.47 77.32,43.26 73.86,46.71 70.54,46.71 69.95,46.13 v69.95,45.36
U11_W2
  Top 0.254: U5.4 74.87,34.63 74.87,35.43 73.5,36.8 72.58,36.8 71.78,37.6 71.78,38.18 U11.15
U12_AD0
  Top 0.254: U12.6 29.95,35.89 30.75,36.69 30.75,39.32 R9.2
U12_B
  Top 0.254: 25.02,33.4 25.15,33.27 | 29.64,32.84 29.77,32.84
  Top 0.305: 33.53,31.83 33.53,31.75 | 24.87,34.8 25.88,35.81 27.18,35.81 27.76,35.23 U12.7 | 29.77,32.84 29.84,32.84
  Top 0.406: 33.53,31.75 35.56,31.75 JP2.1 | 33.53,31.83 32.51,32.84 29.84,32.84 | 25.02,33.4 24.89,33.53 24.89,34.77 24.87,34.8 | 29.64,32.84 29.21,33.27 25.15,33.27
U12_W
  Top 0.254: U12.1 31.77,34.63 35.9,34.63 36.83,35.56 36.83,38.84 36.8,38.86 36.8,39.32 JP3.1
VCC  (via drill 0.61)
  Top 0.406: U5.12 75.59,26.67 C24.1 | 61.62,25.91 U1.12 61.59,25.15 61.59,26.04 61.34,26.29 58.29,26.29 57.94,25.93 57.78,25.93 | 57.78,25.93 58.09,26.24 58.09,26.26 v56.87,28.75 | 57.78,25.93 57.78,25.81 57.76,25.78 57.76,24.11 | 57.76,24.11 58.93,22.94 59.89,22.94 60.64,22.19 C23.1 | v56.79,31.47 56.79,31.57 56.11,32.26 | 54.66,32.26 U4.8 | 57.76,24.11 57.17,24.11 57.15,24.13 v56.52,23.5 | U2.10 U2.11 32.13,27.89 32.16,28.7 32.38,28.93 32.84,28.93 32.87,28.91 32.87,28.42 U2.10 | U2.10 U2.9
  Top 0.457: 56.11,32.26 54.66,32.26
  Top 0.508: 21.27,20.95 C14.2
  Top 0.61: U9.1 21.27,20.95 | 29.26,10.52 28.31,9.56 25.33,9.56 21.98,12.91 21.94,12.91 21.91,12.94 C6.1 | R3.2 v52.07,20.32
  Top 0.762: C16.1 v39.98,11.43 39.55,11.43 38.63,10.52 29.26,10.52 | C6.1 21.95,15.32 21.95,17.72 C5.1 21.95,18.06 | R19.2 17.37,27.89 17.37,22.97 17.95,22.4 18.63,22.4 U9.2 18.97,22.17 19.2,21.95 18.97,21.72 U9.1 | C24.1 75.32,26.63 75.32,24.23 C21.1 74.87,24.12 v72.47,24.12 | C22.1 60.69,17.83 60.69,21.49 C23.1 61.04,21.95 v70.29,21.95 | C29.1 53.03,39.32 53.03,35.66 C28.1 53.15,35.2 54.52,33.83 54.52,32.46 U4.8 | C18.1 42.18,15.32 39.43,15.32 38.98,15.77 38.06,15.77 U7.8
  Top 0.813: 29.26,10.52 29.21,10.57 R13.2 | C14.2 21.91,20.32 C5.1 | v39.88,17.35 38.98,16.45 38.98,15.77 | 33.02,27.94 34.14,27.94 35.23,26.85 35.23,23.98 v33.83,22.58
  Bottom 0.406: v56.87,28.75 56.87,31.39 v56.79,31.47
  Bottom 0.508: v56.52,23.5 56.52,20.95
  Bottom 0.61: 56.52,20.95 55.88,20.32 v52.07,20.32 39.37,20.32 38.14,19.09
  Bottom 0.762: v70.29,21.95 v72.47,24.12
  Bottom 0.813: 30.44,22.58 v33.83,22.58 34.65,22.58 38.14,19.09 v39.88,17.35 | 30.44,22.58 C3.1 | 30.44,22.58 30.44,20.6 C4.1
  pour Bottom (isolate 0.813): 38.1,19.05 38.1,8.89 40.64,8.89 40.64,19.05
  pour Top (no thermals): 31.75,29.21 33.4,29.21 33.4,28.91 33.4,27.53 31.98,27.53 31.98,27.51 31.72,27.51 31.72,29.21
VDD  (via drill 0.61, 0.7)
  Top 0.406: U12.2 30.79,35.23 30.48,34.92 30.48,34.04 30.35,33.91 28.07,33.91 27.53,34.44 | 14.92,48.86 15.38,48.4 | 16.8,44.81 16.52,45.09 16.38,45.09 | 21.95,35.89 21.95,35.84 U8.7
  Top 0.508: 21.95,35.89 22.17,35.89 U8.8
  Top 0.61: 61.38,33.72 62.29,32.8 68.47,32.8 | 16.38,45.09 15.38,46.09 15.38,48.4 14.96,48.82 14.96,48.95
  Top 0.762: U10.2 U10.1 7.89,43.66 9.83,43.66 10.17,43.32 C11.1 | C11.1 10.52,43.09 10.52,40.92 C9.1 10.52,40.58 10.52,38.18 C12.2 10.52,37.72 10.52,34.29 R6.2 | v23.2,34.52 22.63,35.09 22.63,35.78 U8.8 | v21.83,33.26 21.83,31.77 C2.1 21.95,31.43 21.95,28 C15.1 | C27.1 31.66,44.81 28,44.81 C26.1 27.66,44.81 23.2,44.81 | 16.8,44.58 16.8,44.81 23.2,44.81 | 16.8,44.58 16.8,43.2 R18.2 | v23.2,44.46 23.2,44.81 | 16.8,44.58 11.54,44.58 10.52,43.55 C11.1 | C20.1 70.18,49.49 70.18,47.09 C25.1 69.84,46.98 68.01,46.98 | 68.01,46.98 67.09,46.98 R7.2 | 68.01,46.98 68.01,44.81 | 68.01,44.81 68.01,43.09 U11.5 | 64.81,7.32 C19.1 | 67.21,7.32 C17.1 | R8.2 70.07,6.4 68.58,6.4 67.67,7.32 C17.1 | C17.1 67.78,7.66 69.15,9.03 69.15,10.29 U3.5 69.15,10.63 v69.15,13.26 | 61.38,33.72 61.38,34.29 R10.2 61.27,34.63 61.27,41.83 58.64,44.46 R25.2 58.41,44.81 56.24,44.81 R23.2 55.78,44.81 53.72,44.81 R22.2 53.26,44.81 41.6,44.81 R24.2 41.26,44.46 v40.01,44.46 | R20.2 69.49,34.29 69.49,33.83 68.47,32.8 v69.15,32.12 | v68.35,45.31 68.01,44.81
  Top 0.813: v26.24,34.47 27.05,34.47 27.08,34.44 27.53,34.44 | 14.92,48.86 R17.2
  Top 1.016: 67.21,7.32 64.81,7.32 | R9.1 32.66,39.41 32.66,40.64 33.33,41.3 v33.35,41.3
  Bottom 0.406: 33.5,43.94 33.83,44.27 33.83,44.46
  Bottom 0.762: v21.83,33.26 21.95,33.26 v23.2,34.52 v23.2,44.46 33.83,44.46 v40.01,44.46 | v69.15,13.26 v69.15,32.12 69.04,32.46 68.35,33.15 v68.35,45.31
  Bottom 0.813: v26.24,34.47 26.19,34.52 v23.2,34.52
  Bottom 1.016: v33.35,41.3 33.5,41.45 33.5,43.94
VIN
  pour Bottom (isolate 0.305, no thermals): 7.62,25.4 11.43,25.4 11.46,23.62 8.92,23.62 5.08,19.05 1.27,19.05 1.27,22.86 5.08,22.86
ZH  (via drill 0.61)
  Top 0.254: v74.3,30.4 74.3,29.03 U5.10
  Bottom 0.254: 77.38,20.34 Z.1
  Bottom 0.406: v74.3,30.4 74.3,23.43 77.38,20.34
ZL
  Top 0.254: 60.35,25.03 U1.10
  Top 0.305: 60.33,23.55 61.14,22.73 63.88,22.73
  Top 0.406: Z.2 73.81,20.32 71.14,22.99 69.77,22.99 69.52,22.73 63.88,22.73 | 60.35,25.03 60.33,25.01 60.33,23.55

## Text on the board
tNames: Rev1.3 | IDEA Lab, UTD | Athul Asokan Thulasi